# Altium PCB 示波器pcb.PcbDoc
Units mil, origin at the board's own origin, x right, y up, seen from the top; angles counter-clockwise.
Board outline 6795 x 3885 mil, 2 copper layers (Top Layer, Bottom Layer); 127 components, 203 nets, 627 pads, 78 vias.
Unrouted connection lines stored in the file: 167.
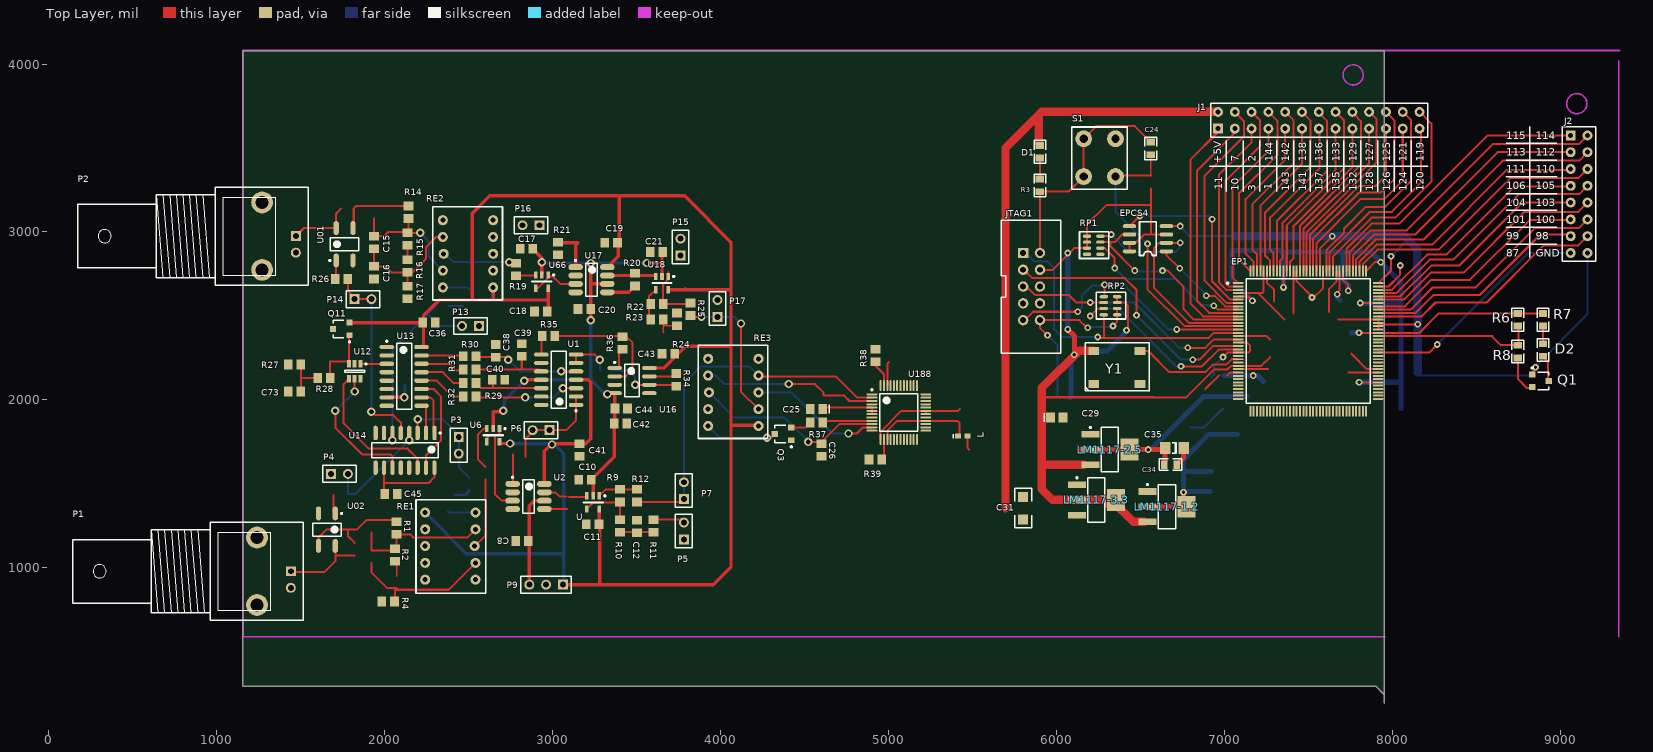
[diagram p0: Top Layer view]
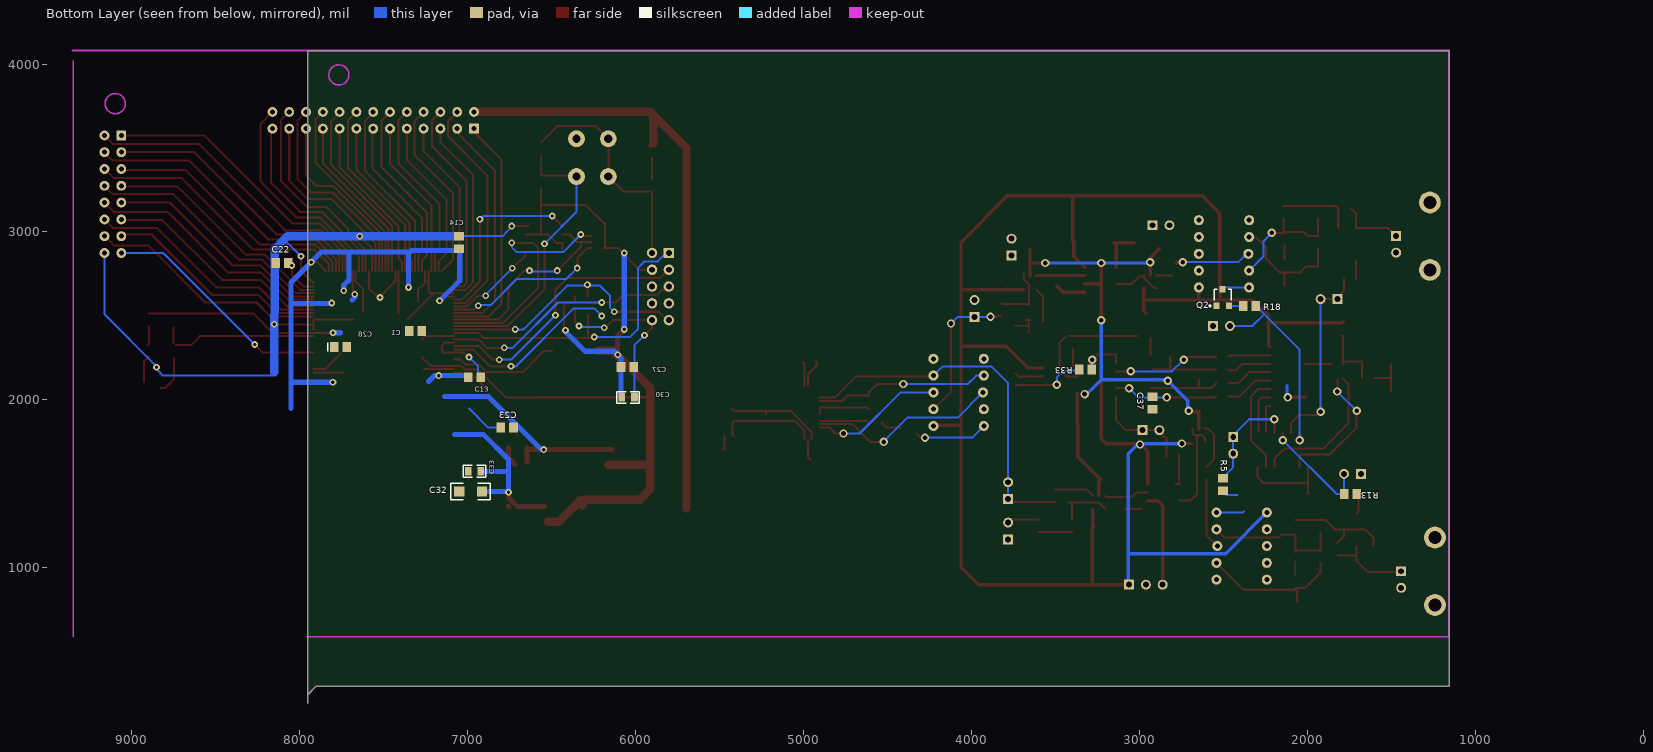
[diagram p1: Bottom Layer view, seen from below]

## Layer stack, top to bottom
Top Layer: signal copper 1.4
Dielectric: dielectric 12.6, FR-4, Dk 4.8
Bottom Layer: signal copper 1.4

## Board outline
1155,4080 7950,4080 7950,195 7950,245 7900,295 2380,295 1155,295 1155,4080

## Design rules (kind name [scope] priority, off if disabled: settings)
Clearance [All] p1: gap=1
HoleToHoleClearance [All] p1: gap=1 allowstackedmicrovias=TRUE
MinimumSolderMaskSliver [All] p1: minsoldermaskwidth=1
PolygonConnect [All] p1: connectstyle=Relief reliefconductorwidth=10 reliefentries=4 polygonreliefangle="90 Angle"
RoutingVias [All] p1: holewidth=28 width=50 viastyle="Through Hole" minholewidth=28 minwidth=50 maxholewidth=28 maxwidth=50
SilkToSilkClearance [All] p1: silktosilkclearance=1
SilkscreenOverComponentPads [All] p1: minsilkscreentomaskgap=1
SolderMaskExpansion [All] p1: expansion=4
TestPointUsage [All] p1: valid=0 allowmultiple=FALSE
Testpoint [All] p1: side=15 testpointundercomponent=TRUE minsize=40 maxsize=100 preferedsize=60 minholesize=0 maxholesize=40 preferedholesize=32 testpointgrid=1 style=1021 order=0-112345678
Width [All] p1: maxlimit=100 minlimit=10 preferedwidth=10
20 further rules are at their usual default settings.

## Classes and differential pairs
component class part_2: J1 J2
component class NEW_FPGA: D1 D2 EP1 EPCS4 JTAG1 LM1117-1.2 LM1117-2.5 LM1117-3.3 RP1 RP2 S1 Y1
component class 示波器原理图5: C25 C26 C27 C28 C29 C30 C31 L Q3 R37 R38 R39 RE3 u1 U188
component class 示波器原理图3: C32 C33 C34 C35 C36 C37 C38 C39 C40 C41 C42 C43 C44 C45 C73 Q11 R27 R28 R29 R30 R31 R32 R33 R34 R35 R36 U1 U12 U13 U14 U16 U?
component class 示波器原理图: C1 C2 C3 C4 C5 C6 C7 C8 C9 C10 C11 C12 P1 P3 P4 P5 P6 P7 P9 Q1 R1 R2 R3 R4 R5 R6 R7 R8 R9 R10 R11 R12 R13 RE1 RE4 U U02 U2 U6 U9 U20 U21
component class 示波器原理图2: C13 C14 C15 C16 C17 C18 C19 C20 C21 C22 C23 C24 P2 P13 P14 P15 P16 P17 Q2 R14 R15 R16 R17 R18 R19 R20 R21 R22 R23 R24 R25 R26 RE2 U01 U17 U18 U66

## Components (designator, comment, footprint, x,y, rotation, side; value= is the part's Value field where it differs from the comment)
C1 "" PCBComponent_1#1 7345,2410 r180 bottom
C8 "" PCBComponent_1#1 2780,1160 r0 top
C10 "" PCBComponent_1#1 3155,1525 r0 top
C11 "" PCBComponent_1#1 3200,1260 r0 top
C12 "" PCBComponent_1#1 3500,1210 r90 top
C13 "" PCBComponent_1#1 6920,2135 r0 bottom
C14 "" PCBComponent_1#1 7050,2975 r270 bottom
C15 "" PCBComponent_1#1 1935,2900 r90 top
C16 "" PCBComponent_1#1 1935,2720 r90 top
C17 "104" PCBComponent_1#1 2880,2900 r180 top
C18 "" PCBComponent_1#1 2965.88,2525.88 r180 top
C19 "" PCBComponent_1#1 3310,2935.74 r0 top
C20 "" PCBComponent_1#1 3150,2540.74 r0 top
C21 "" PCBComponent_1#1 3580,2880 r0 top
C22 "" PCBComponent_1#1 8140,2815 r180 bottom
C23 "" PCBComponent_1#1 6800,1835 r180 bottom
C24 "" 0805 6560,3535 r270 top
C25 "" C0805 4570,1945 r180 top
C26 "" PCBComponent_1#1 4600,1740 r270 top
C27 "" PCBComponent_1#1 6085,2195 r180 bottom
C28 "" C0805 7755,2315 r180 bottom
C29 "" C0805 6000,1895 r0 top
C30 "" 0805 6080,2015 r180 bottom
C31 "" C1206#1 5800,1355 r90 top
C32 "" C1206#1 6980,1455 r0 bottom
C33 "" 0805 6920,1575 r0 bottom
C34 "" 0805 6640,1615 r0 top
C35 "" C1206#2 6700,1715 r180 top
C36 "" PCBComponent_1#1 2300,2460 r180 top
C37 "" PCBComponent_1#1 2920,2020 r270 bottom
C38 "" PCBComponent_1#1 2660,2255 r90 top
C39 "" PCBComponent_1#1 2815,2260 r90 top
C40 "" PCBComponent_1#1 2640,2120 r0 top
C41 "" PCBComponent_1#1 3160,1740 r270 top
C42 "" PCBComponent_1#1 3440,1860 r180 top
C43 "" PCBComponent_1#1 3725,2275 r180 top
C44 "" PCBComponent_1#1 3370,1950 r0 top
C45 "" PCBComponent_1#1 2000,1440 r0 top
C73 "" PCBComponent_1#1 1425,2050 r0 top
D1 "LED0" 0805 5900,3515 r270 top
D2 "LED0" 0805 8895,2335 r270 top
EP1 "" PCBComponent_1#2 7080,2695 r0 top locked
EPCS4 "" PCBComponent_1#3 6540,2895 r180 top
J1 "" HDR2X13_CEN 6960,3615 r0 top locked
J2 "" HDR2X8_CEN 9060,3575 r270 top locked
JTAG1 "Header 5X2" IDC10 5800,2875 r270 top
L "" L0603 5440,1785 r0 top
LM1117-1.2 "" PCBComponent_1#4 6540,1455 r0 top
LM1117-2.5 "" PCBComponent_1#4 6200,1795 r0 top
LM1117-3.3 "" PCBComponent_1#4 6120,1495 r0 top
P1 "BNC" "BNC_RA CON" 1440,980 r0 top
P2 "BNC" "BNC_RA CON" 1470,2975 r0 top
P3 "Header 2" HDR1X2 2440,1780 r270 top
P4 "Header 2" HDR1X2 1680,1560 r0 top
P5 "Header 2" HDR1X2 3780,1170 r90 top
P6 "Header 2" HDR1X2 2980,1820 r180 top
P7 "Header 2" HDR1X2 3780,1410 r90 top
P9 "Header 3" HDR1X3 3060,900 r180 top
P13 "Header 2" HDR1X2 2560,2440 r180 top
P14 "Header 2" HDR1X2 1820,2600 r0 top
P15 "Header 2" HDR1X2 3760,2860 r90 top
P16 "Header 2" HDR1X2 2920,3040 r180 top
P17 "Header 2" HDR1X2 3980,2495 r90 top
Q1 "8050" PCBComponent_1#5 8830.71,2150.71 r270 top
Q2 "8050" PCBComponent_1#5 2540,2560 r180 bottom
Q3 "80501" PCBComponent_1#5 4420,1760 r90 top
Q11 "80501" PCBComponent_1#5 1790,2385 r90 top
R1 "" PCBComponent_1#1 2070,1200 r90 top
R2 "" PCBComponent_1#1 2060,1040 r90 top
R3 "" 0805 5900,3315 r270 top
R4 "" 2012[0805] 2020,800 r0 top
R5 "" PCBComponent_1#1 2500,1460 r90 bottom
R6 "" 0805 8745,2515 r270 top
R7 "" 0805 8895,2515 r270 top
R8 "" 0805 8745,2325 r270 top
R9 "" 2012[0805] 3400,1430 r270 top
R10 "" 2012[0805] 3400,1250 r90 top
R11 "" 2012[0805] 3600,1250 r270 top
R12 "" 2012[0805] 3500,1430 r90 top
R13 "" PCBComponent_1#1 1780,1440 r180 bottom
R14 "" PCBComponent_1#1 2140,3080 r90 top
R15 "" PCBComponent_1#1 2135,2920 r90 top
R16 "" PCBComponent_1#1 2135,2760 r90 top
R17 "" 2012[0805] 2135,2640 r90 top
R18 "" PCBComponent_1#1 2380,2560 r180 bottom
R19 "" PCBComponent_1#1 2780,2740 r90 top
R20 "" 2012[0805] 3490,2715.74 r270 top
R21 "" 2012[0805] 3030,2900.74 r90 top
R22 "" 2012[0805] 3620,2570 r180 top
R23 "" 2012[0805] 3620,2480 r180 top
R24 "" 2012[0805] 3740,2480 r270 top
R25 "" 2012[0805] 3820,2540 r90 top
R26 "" PCBComponent_1#1 1780,2720 r180 top
R27 "" PCBComponent_1#1 1499.8,2210 r180 top
R28 "" PCBComponent_1#1 1600,2130 r0 top
R29 "51" 2012[0805] 2505,2020 r0 top
R30 "51" 2012[0805] 2505,2260 r0 top
R31 "51" 2012[0805] 2505,2180 r0 top
R32 "51" 2012[0805] 2505,2100 r0 top
R33 "" 2012[0805] 3320,2180 r0 bottom
R34 "" 2012[0805] 3735,2120 r90 top
R35 "" 2012[0805] 2975,2380 r0 top
R36 "" 2012[0805] 3415,2340 r270 top
R37 "1K" 2012[0805] 4570,1865 r180 top
R38 "51" 2012[0805] 4920,2265 r90 top
R39 "51" 2012[0805] 4920,1645 r180 top
RE1 "TQ2-5V" PCBComponent_1#6 2240,1555 r270 top
RE2 "TQ2-5V" PCBComponent_1#6 2645,2445 r90 top
RE3 "" PCBComponent_1#6 4225,1620 r90 top
RP1 "Res Pack" PCBComponent_1#7 6180,2975 r0 top
RP2 "Res Pack" PCBComponent_1#7 6280,2615 r0 top
S1 "SW-SPST" SB-4 6160,3555 r270 top
U "AD8055ART" SOT95P245X110-5N 3240,1390 r270 top
U1 "TL074D" SOP127P600X175-14N 3035,2120 r180 top
U01 "" SOP254P610X218-4N 1860,3120 r90 top
U2 "AD603AR" SOIC127P600X175-8N 2855,1425 r0 top
U02 "" SOP254P610X218-4N 1555,1035 r270 top
U6 "AD8055ART3" SOT95P245X110-5N 2645,1790 r270 top
U12 "AD5320" SOT86P280X110-6N 1820,2170 r270 top
U13 "74HC4051" SOP127P600X175-16N 2115,2140 r0 top
U14 "SN74HC595D" SOP127P600X175-16N 2120,1700 r270 top
U16 "TL072D" SOP127P600X175-8N 3575,2040 r0 top
U17 "AD603AR" SOIC127P600X175-8N 3230,2715.74 r0 top
U18 "AD8055ART" SOT95P245X110-5N 3650,2695.74 r270 top
U66 "AD8055ART3" SOT95P245X110-5N 2935,2705 r270 top
U188 "" TSQFP50P900X900X160-48N 5060,1925 r0 top
Y1 "Active crystal" 5*7CRASTAL 6220,2095 r0 top

## Footprints (in the part's own frame and the unit in brackets; to place one, negate y for a bottom-side part, rotate by r counter-clockwise, add the part's x,y. Pads: shape width x height; smd on the part's side, far side on the other; paste and mask are expansions set on the pad)
5*7CRASTAL [mm]
  rect 1.6x1.2 smd: 1(0,0) 2(7,0) 3(7,5) 4(0,5)
  silkscreen extent -1.27,-1.04 8.38,6.22
0805 [mil]
  rect 40x50 smd: 1(0,0) 2(75,0)
  silkscreen extent -30,-35 105,35
2012[0805] [mm] "Chip Resistor; Body 2.0 x 1.3 mm (LxW typ)"
  rect 1.3x1.5 smd: 1(-0.95,0) 2(0.95,0)
"BNC_RA CON" [mm] "Connector; BNC Elbow"
  rect 1.5x1.5 hole 0.9: 1(0,0)
  round 3.3 hole 2: 2(-5.1,-5.1) 2(-5.1,5.1)
  round 1.5 hole 0.9: 2(0,-2.5)
  silkscreen extent -33,-7.4 1.9,7.4
C0805 [mm] "Chip Capacitor; Body 2.0 x 1.2 mm (LxW typ)"
  rect 1.3x1.5 smd: 1(-0.95,0) 2(0.95,0)
  silkscreen extent -1.9,-0.65 -1.9,0.65
C1206#1 [mil]
  rect 60x60 smd: 1(-67,0) 2(68,0)
  silkscreen extent -117,-50 118,50
C1206#2 [mil] "Chip Capacitor; Body 3.2 x 1.6 mm (LxW typ)"
  rect 62.99x70.87 smd: 1(-55.12,0) 2(55.12,0)
  silkscreen extent -12,-31 12,31
HDR1X2 [mm] "Connector; Header; 2 Position"
  rect 1.5x1.5 hole 0.9: 1(0,0)
  round 1.5 hole 0.9: 2(2.54,0)
  silkscreen extent -1.27,-1.27 3.81,1.27
HDR1X3 [mm] "Connector; Header; 3 Position"
  rect 1.5x1.5 hole 0.9: 1(0,0)
  round 1.5 hole 0.9: 2(2.54,0) 3(5.08,0)
  silkscreen extent -1.27,-1.27 6.35,1.27
HDR2X8_CEN [mm] "Connector; Header; 8x2 Position"
  rect 1.5x1.5 hole 0.762: 1(0,0)
  round 1.5 hole 0.762: 2(2.54,0) 3(5.08,0) 4(7.62,0) 5(10.16,0) 6(12.7,0) 7(15.24,0) 8(17.78,0) 9(0,2.54) 10(2.54,2.54) 11(5.08,2.54) 12(7.62,2.54) 13(10.16,2.54) 14(12.7,2.54) 15(15.24,2.54) 16(17.78,2.54)
  silkscreen extent -1.27,-1.27 19.05,3.81
HDR2X13_CEN [mm] "Connector; Header; 13x2 Position"
  rect 1.5x1.5 hole 0.762: 1(0,0)
  round 1.5 hole 0.762: 2(2.54,0) 3(5.08,0) 4(7.62,0) 5(10.16,0) 6(12.7,0) 7(15.24,0) 8(17.78,0) 9(20.32,0) 10(22.86,0) 11(25.4,0) 12(27.94,0) 13(30.48,0) 14(0,2.54) 15(2.54,2.54) 16(5.08,2.54) 17(7.62,2.54) 18(10.16,2.54) 19(12.7,2.54) 20(15.24,2.54) 21(17.78,2.54) 22(20.32,2.54) 23(22.86,2.54) 24(25.4,2.54) 25(27.94,2.54) 26(30.48,2.54)
  silkscreen extent -1.06,-1.27 31.75,3.81
IDC10 [mil]
  rect 62x62 hole 35: 1(0,0)
  round 62 hole 35: 2(0,100) 3(100,0) 4(100,100) 5(200,0) 6(200,100) 7(300,0) 8(300,100) 9(400,0) 10(400,100)
  silkscreen extent -195,-129 597,225
L0603 [mm] "Chip Inductor; Body 1.6 x 0.8 mm (LxW typ)"
  rect 0.9x0.8 smd: 1(-0.7,0) 2(0.7,0)
  silkscreen extent -1.45,-0.3 -1.45,0.3
PCBComponent_1#1 [mm]
  rect 1.3x1.5 smd: 1(0,0) 2(1.9,0)
PCBComponent_1#2 [mm]
  rect 1.6x0.3 smd: 1(0,0) 2(0,-0.5) 3(0,-1) 4(0,-1.5) 5(0,-2) 6(0,-2.5) 7(0,-3) 8(0,-3.5) 9(0,-4) 10(0,-4.5) 11(0,-5) 12(0,-5.5) 13(0,-6) 14(0,-6.5) 15(0,-7) 16(0,-7.5) 17(0,-8) 18(0,-8.5) 19(0,-9) 20(0,-9.5) 21(0,-10) 22(0,-10.5) 23(0,-11) 24(0,-11.5) 25(0,-12) 26(0,-12.5) 27(0,-13) 28(0,-13.5) 29(0,-14) 30(0,-14.5) 31(0,-15) 32(0,-15.5) 33(0,-16) 34(0,-16.5) 35(0,-17) 36(0,-17.5) 73(21.2,-17.5) 74(21.2,-17) 75(21.2,-16.5) 76(21.2,-16) 77(21.2,-15.5) 78(21.2,-15) 79(21.2,-14.5) 80(21.2,-14) 81(21.2,-13.5) 82(21.2,-13) 83(21.2,-12.5) 84(21.2,-12) 85(21.2,-11.5) 86(21.2,-11) 87(21.2,-10.5) 88(21.2,-10) 89(21.2,-9.5) 90(21.2,-9) 91(21.2,-8.5) 92(21.2,-8) 93(21.2,-7.5) 94(21.2,-7) 95(21.2,-6.5) 96(21.2,-6) 97(21.2,-5.5) 98(21.2,-5) 99(21.2,-4.5) 100(21.2,-4) 101(21.2,-3.5) 102(21.2,-3) 103(21.2,-2.5) 104(21.2,-2) 105(21.2,-1.5) 106(21.2,-1) 107(21.2,-0.5) 108(21.2,0)
  rect 0.3x1.6 smd: 37(1.85,-19.35) 38(2.35,-19.35) 39(2.85,-19.35) 40(3.35,-19.35) 41(3.85,-19.35) 42(4.35,-19.35) 43(4.85,-19.35) 44(5.35,-19.35) 45(5.85,-19.35) 46(6.35,-19.35) 47(6.85,-19.35) 48(7.35,-19.35) 49(7.85,-19.35) 50(8.35,-19.35) 51(8.85,-19.35) 52(9.35,-19.35) 53(9.85,-19.35) 54(10.35,-19.35) 55(10.85,-19.35) 56(11.35,-19.35) 57(11.85,-19.35) 58(12.35,-19.35) 59(12.85,-19.35) 60(13.35,-19.35) 61(13.85,-19.35) 62(14.35,-19.35) 63(14.85,-19.35) 64(15.35,-19.35) 65(15.85,-19.35) 66(16.35,-19.35) 67(16.85,-19.35) 68(17.35,-19.35) 69(17.85,-19.35) 70(18.35,-19.35) 71(18.85,-19.35) 72(19.35,-19.35) 109(19.35,1.85) 110(18.85,1.85) 111(18.35,1.85) 112(17.85,1.85) 113(17.35,1.85) 114(16.85,1.85) 115(16.35,1.85) 116(15.85,1.85) 117(15.35,1.85) 118(14.85,1.85) 119(14.35,1.85) 120(13.85,1.85) 121(13.35,1.85) 122(12.85,1.85) 123(12.35,1.85) 124(11.85,1.85) 125(11.35,1.85) 126(10.85,1.85) 127(10.35,1.85) 128(9.85,1.85) 129(9.35,1.85) 130(8.85,1.85) 131(8.35,1.85) 132(7.85,1.85) 133(7.35,1.85) 134(6.85,1.85) 135(6.35,1.85) 136(5.85,1.85) 137(5.35,1.85) 138(4.85,1.85) 139(4.35,1.85) 140(3.85,1.85) 141(3.35,1.85) 142(2.85,1.85) 143(2.35,1.85) 144(1.85,1.85)
  silkscreen extent -1.75,-18.15 20,0.65
PCBComponent_1#3 [mm]
  oval 2.032x0.61 smd: 1(-2.87,0.254) 2(-2.87,-1.016) 3(-2.87,-2.286) 4(-2.87,-3.556) 5(2.718,-3.556) 6(2.718,-2.286) 7(2.718,-1.016) 8(2.718,0.254)
  silkscreen extent -1.35,-4.19 1.19,0.89
PCBComponent_1#4 [mm]
  rect 2.7x1 smd: 1(0,0) 2(0,-2.3) 3(0,-4.6)
  rect 2.7x3.3 smd: 4(5.9,-2.3)
  silkscreen extent -0.12,-5.65 4.25,1.17, body extent 1.1,-5.65 4.8,1.05, height 1.7
PCBComponent_1#5 [mm]
  rect 0.9x0.95 smd: 1(0,0) 2(1.9,0) 3(0.95,2.5)
  silkscreen extent -1.12,-0.12 2.25,2.5
PCBComponent_1#6 [mm]
  round 1.524 hole 0.762: 1(5.715,0) 2(8.255,0) 3(10.795,0) 4(13.335,0) 5(15.875,0) 6(15.875,7.62) 7(13.335,7.62) 8(10.795,7.493) 9(8.255,7.62) 10(5.715,7.62)
  silkscreen extent 3.81,-1.4 17.91,9.14
PCBComponent_1#7 [mm]
  oval 1.27x0.508 smd: 1(0,0) 2(0,-0.889) 3(0,-1.803) 4(0,-2.743) 5(2.032,-2.743) 6(2.032,-1.803) 7(2.032,-0.889) 8(2.032,0)
  silkscreen extent -1.14,-3.38 3.3,0.69
SB-4 [mil]
  round 100 hole 50: 1(0,0) 1(225,0) 2(0,190) 2(225,190)
  silkscreen extent -70,-70 300,260
SOIC127P600X175-8N [mm] "SOIC, 8-Leads, Body 5.0x4.0mm (max), Pitch 1.27mm, IPC Medium Density"
  oval 2.2x0.9 smd: 1(-2.4,1.905) 2(-2.4,0.635) 3(-2.4,-0.635) 4(-2.4,-1.905) 5(2.4,-1.905) 6(2.4,-0.635) 7(2.4,0.635) 8(2.4,1.905)
  silkscreen extent -2.52,-2.5 0.9,3.03, body extent -2,-2.5 2,2.5, height 1.75
SOP127P600X175-8N [mm] "SOP, 8-Leads, Body 4.9x3.9mm (max), Pitch 1.27mm, IPC Medium Density"
  oval 2.2x0.6 smd: 1(-5.25,3.81) 2(-5.25,2.54) 3(-5.25,1.27) 4(-5.25,0) 5(0,0) 6(0,1.27) 7(0,2.54) 8(0,3.81)
  silkscreen extent -5.37,-0.55 -1.5,4.78, body extent -4.58,-0.55 -0.68,4.36, height 1.75
SOP127P600X175-14N [mm] "SOP, 14-Leads, Body 8.6x7.1mm (max), Pitch 1.27mm, IPC Medium Density"
  oval 2.2x0.65 smd: 1(-2.625,3.81) 2(-2.625,2.54) 3(-2.625,1.27) 4(-2.625,0) 5(-2.625,-1.27) 6(-2.625,-2.54) 7(-2.625,-3.81) 8(2.625,-3.81) 9(2.625,-2.54) 10(2.625,-1.27) 11(2.625,0) 12(2.625,1.27) 13(2.625,2.54) 14(2.625,3.81)
  silkscreen extent -2.75,-4.3 1.12,4.81, body extent -3.55,-4.33 3.55,4.33, height 1.75
SOP127P600X175-16N [mm] "SOP, 16-Leads, Body 10.0x8.9mm (max), Pitch 1.27mm, IPC Medium Density"
  oval 2.2x0.65 smd: 1(-2.625,4.445) 2(-2.625,3.175) 3(-2.625,1.905) 4(-2.625,0.635) 5(-2.625,-0.635) 6(-2.625,-1.905) 7(-2.625,-3.175) 8(-2.625,-4.445) 9(2.625,-4.445) 10(2.625,-3.175) 11(2.625,-1.905) 12(2.625,-0.635) 13(2.625,0.635) 14(2.625,1.905) 15(2.625,3.175) 16(2.625,4.445)
  silkscreen extent -2.75,-5 1.12,5.44, body extent -4.44,-5 4.44,5, height 1.75
SOP254P610X218-4N [mm] "SOP, 4-Leads, Body 4.3x3.9mm (max), Pitch 2.54mm, IPC Medium Density"
  oval 2.1x0.8 smd: 1(-7.35,3.81) 2(-7.35,1.27) 3(-2.45,1.27) 4(-2.45,3.81)
  silkscreen extent -7.47,0.39 -3.9,4.88, body extent -6.85,0.4 -2.96,4.68, height 2.18
SOT86P280X110-6N [mm] "SOT23, 6-Leads, Body 3.0x2.8mm (max), Pitch 0.86mm, IPC Medium Density"
  rect 1.15x0.6 smd: 1(-1.125,0.86) 2(-1.125,0) 3(-1.125,-0.86) 4(1.125,-0.86) 5(1.125,0) 6(1.125,0.86)
  silkscreen extent -1.25,-1.5 0.15,1.84, body extent -0.9,-1.5 0.9,1.5, height 1.1
SOT95P245X110-5N [mm] "SOT23, 5-Leads, Body 3.0x2.6mm (max), Pitch 0.95mm, IPC Medium Density"
  rect 1.1x0.55 smd: 1(-1,0.95) 2(-1,0) 3(-1,-0.95) 4(1,-0.95) 5(1,0.95)
  silkscreen extent -1.12,-1.5 0.05,1.9, body extent -0.7,-1.5 0.7,1.5, height 1.1
TSQFP50P900X900X160-48N [mm] "TSQFP, 48-Leads, Body 9.0x9.0mm (max), Pitch 0.50mm, IPC Medium Density"
  oval 1.65x0.3 smd: 1(-4.075,2.75) 2(-4.075,2.25) 3(-4.075,1.75) 4(-4.075,1.25) 5(-4.075,0.75) 6(-4.075,0.25) 7(-4.075,-0.25) 8(-4.075,-0.75) 9(-4.075,-1.25) 10(-4.075,-1.75) 11(-4.075,-2.25) 12(-4.075,-2.75) 25(4.075,-2.75) 26(4.075,-2.25) 27(4.075,-1.75) 28(4.075,-1.25) 29(4.075,-0.75) 30(4.075,-0.25) 31(4.075,0.25) 32(4.075,0.75) 33(4.075,1.25) 34(4.075,1.75) 35(4.075,2.25) 36(4.075,2.75)
  oval 0.3x1.65 smd: 13(-2.75,-4.075) 14(-2.25,-4.075) 15(-1.75,-4.075) 16(-1.25,-4.075) 17(-0.75,-4.075) 18(-0.25,-4.075) 19(0.25,-4.075) 20(0.75,-4.075) 21(1.25,-4.075) 22(1.75,-4.075) 23(2.25,-4.075) 24(2.75,-4.075) 37(2.75,4.075) 38(2.25,4.075) 39(1.75,4.075) 40(1.25,4.075) 41(0.75,4.075) 42(0.25,4.075) 43(-0.25,4.075) 44(-0.75,4.075) 45(-1.25,4.075) 46(-1.75,4.075) 47(-2.25,4.075) 48(-2.75,4.075)
  silkscreen extent -4.2,-2.85 2.85,3.57, body extent -3.5,-3.5 3.5,3.5, height 1.6

## Part data
C1 C13 C14 C22 C23 C24 C27 C35: library part "Cap Semi", "Capacitor (Semiconductor SIM Model)"
C8 C10 C11 C12 C15 C16 C17 C18 C19 C20 C21 C26 C36 C37 C38 C39 C40 C41 C42 C43 C44 C45 C73: library part Cap, "Capacitor"
C25 C28 C29: library part "Cap Pol3", "Polarized Capacitor (Surface Mount)"
C30 C33 C34: library part CAP, "Capacitor"
C31 C32: library part "Cap Pol2", "Polarized Capacitor (Axial)"
D1 D2: "Typical INFRARED GaAs LED"
EP1 EPCS4 LM1117-1.2 LM1117-2.5 LM1117-3.3 RE1 RE2 RE3 U01 U02 U12 U13 U188: library part Component_1
J1: library part "Header 13X2A", "Header, 13-Pin, Dual row"
J2: library part "Header 8X2A", "Header, 8-Pin, Dual row"
JTAG1: "Header, 5-Pin, Dual row"
L: library part Inductor, "Inductor"
P1 P2: "BNC Elbow Connector"
P3 P4 P5 P6 P7 P13 P14 P15 P16 P17: "Header, 2-Pin"
P9: "Header, 3-Pin"
Q1: library part 2N3904, "NPN General Purpose Amplifier"
Q2 Q3 Q11: library part 2N3906, "PNP General Purpose Amplifier"
R1 R2 R5 R13 R14 R15 R16 R18 R19 R26 R27 R28: library part Res1, "Resistor"
R3 R6 R7 R8: library part Res2, "Resistor"
R4 R9 R10 R11 R12 R17 R20 R21 R22 R23 R24 R25 R29 R30 R31 R32 R33 R34 R35 R36 R37 R38 R39: library part "Res Semi", "Semiconductor Resistor"
RP1 RP2: library part "Res Pack3", "Isolated Resistor Network"
S1: library part SW-SPST_1, "Single-Pole, Single-Throw Switch"
U U18: "Low Cost, 300MHz Voltage Feedback Amplifier"
U1 U16: "Low-Noise JFET-Input Operational Amplifier"
U2 U17: "Low-Noise, 90MHz Variable Gain Amplifier"
U6 U66: library part AD8055ART, "Low Cost, 300MHz Voltage Feedback Amplifier"
U14: "8-Bit Shift Register with 3-State Output Registers"

## Via types
v1: diameter 40, hole 20, Top Layer to Bottom Layer, 48 vias
v2: diameter 50, hole 28, Top Layer to Bottom Layer, 30 vias

## Nets (pads, with @x,y where several pads share a name; then routed paths per layer and width w, separated by ;. In a path a pad name is that pad's centre, name@x,y a point inside that pad or via, vN(x,y) a via of type N, cw(c..) or ccw(c..) an arc to the next point about the centre after c; other vN are vias at no path point)
1: EP1.1 J1.4 | length 1023.6
  Top Layer w12: EP1.1 7045,2730 7045,3265 7260,3480 J1.4
2: EP1.2 J1.16 | length 1208.8
  Top Layer w12: EP1.2 7024.69,2675.32 7005,2695 7005,3305 7210,3510 7210,3665 J1.16
3: EP1.3 J1.3 | length 1129.2
  Top Layer w12: EP1.3 7009.37,2655.63 6965,2700 6965,3340 7160,3535 J1.3
3.3V: C45.1 U14.10 U14.16 | length 538.4
  Top Layer w12: 1995,1505 2260,1505 2295,1540 U14.16 ; U14.10@1995,1588.15 U14.10 1995,1445 C45.1
5V: D1.1 J1.14 LM1117-3.3.3 | length 3679.8
  Top Layer w12: 5910,3715 5920,3705
  Top Layer w30: D1.1@5892.3,3527.7 D1.1@5905,3515
  Top Layer w50: 5695,1355 5695,3500 5877.5,3682.5 ; D1.1@5892.3,3527.7 5892.3,3697.3 5910,3715 J1.14
7: EP1.7 J1.15 | length 1366.1
  Top Layer w12: J1.15@7070,3705 7115,3660 7115,3570 6880,3335 6880,2710 7013.11,2576.89 EP1.7
10: EP1.10 J1.2 | length 1393.1
  Top Layer w12: J1.2 7060,3590 6835,3365 6835,2590 6907.17,2517.83 EP1.10
11: EP1.11 J1.1 | length 1425.2
  Top Layer w12: J1.1 6960,3595 6795,3430 6795,2575 6871.85,2498.15 EP1.11
28: EP1.28 | length 185.8
  Top Layer w12: 6885,2065 6965,2145 ; 7015,2145 7033.5,2163.5 EP1.28
30: EP1.30
31: EP1.31
32: EP1.32
33: EP1.33
34: EP1.34
38: EP1.38
39: EP1.39
42: EP1.42
43: EP1.43
44: EP1.44
46: EP1.46
49: EP1.49
50: EP1.50
51: EP1.51
52: EP1.52
53: EP1.53
54: EP1.54
55: EP1.55
58: EP1.58
59: EP1.59
60: EP1.60
64: EP1.64
65: EP1.65
66: EP1.66
67: EP1.67
68: EP1.68
69: EP1.69
70: EP1.70
71: EP1.71
72: EP1.72
73: EP1.73
74: EP1.74
75: EP1.75
76: EP1.76
77: EP1.77
80: EP1.80
83: EP1.83
84: EP1.84
85: EP1.85
86: EP1.86
87: EP1.87 | length 1391.1
  Top Layer w12: EP1.87 8216.61,2281.61 v1(8265,2330)
  Bottom Layer w12: v1(8265,2330) 8810,2875 9060,2875
98: EP1.98 | length 1442.9
  Top Layer w12: EP1.98 8173.15,2498.15 8255,2580 8560,2580 8900,2920 9105,2920 9160,2975
99: EP1.99 | length 1309.9
  Top Layer w12: EP1.99 8137.83,2517.83 8245,2625 8520,2625 8880,2985 9031.06,2985
100: EP1.100 | length 1468
  Top Layer w12: EP1.100 8107.52,2537.52 8240,2670 8495,2670 8850,3025 9110,3025 9160,3075
101: EP1.101 | length 1355.8
  Top Layer w12: EP1.101 8072.2,2557.2 8230,2715 8460,2715 8815,3070 9058,3070
103: EP1.103 | length 1484.9
  Top Layer w12: EP1.103 8066.57,2596.57 8230,2760 8425,2760 8785,3120 9105,3120 9160,3175
104: EP1.104 | length 1369.8
  Top Layer w12: EP1.104 8046.26,2616.26 8230,2800 8395,2800 8770,3175 9053,3175
105: EP1.105 | length 1510.1
  Top Layer w12: EP1.105 8020.94,2635.94 8220,2835 8360,2835 8750,3225 9110,3225 9160,3275
106: EP1.106 | length 1399
  Top Layer w12: EP1.106 7995.63,2655.63 8205,2865 8320,2865 8725,3270 9045,3270 9055,3280
110: EP1.110 | length 1612.4
  Top Layer w12: EP1.110 7822.13,2807.13 7910,2895 8275,2895 8700,3320 9105,3320 9160,3375
111: EP1.111 | length 1549
  Top Layer w12: EP1.111 7802.44,2822.44 7905,2925 8235,2925 8680,3370 9070,3370
112: EP1.112 | length 1728.2
  Top Layer w12: EP1.112 7782.76,2837.76 7900,2955 8185,2955 8655,3425 8890,3425 ; 8880,3425 9110,3425 9165,3480
113: EP1.113 | length 1646.8
  Top Layer w12: EP1.113 7763.07,2858.07 7890,2985 8135,2985 8625,3475 9050,3475 9060,3485
114: EP1.114 J2.9 | length 1818.6
  Top Layer w12: EP1.114 7743.39,2883.39 7870,3010 8085,3010 8600,3525 9110,3525 J2.9
115: EP1.115 J2.1 | length 1747.3
  Top Layer w12: EP1.115 7723.7,2898.7 7875,3050 8040,3050 8565,3575 J2.1
119: EP1.119 J1.26 | length 1300.5
  Top Layer w12: EP1.119 7644.96,2854.96 7875,3085 8015,3085 8230,3300 8230,3645 J1.26
120: EP1.120 J1.13 | length 1153.1
  Top Layer w12: EP1.120 7625.28,2880.28 7865,3120 7995,3120 8170,3295 8170,3605 J1.13
121: EP1.121 J1.25 | length 1244.2
  Top Layer w12: EP1.121 7605.59,2890.59 7710,2995 7710,3020 7840,3150 7955,3150 8110,3305 8110,3665 J1.25
124: EP1.124 J1.12 | length 1143
  Top Layer w12: EP1.124 7546.54,2933.46 7808.07,3195 7950,3195 8060,3305 J1.12
125: EP1.125 J1.24 | length 1244.2
  Top Layer w12: EP1.125 7526.85,2961.85 7800,3235 7930,3235 8010,3315 8010,3665 J1.24
126: EP1.126 J1.11 | length 1093.3
  Top Layer w12: EP1.126 7507.17,2982.17 7800,3275 7900,3275 7960,3335 J1.11
127: EP1.127 J1.23 | length 1138.7
  Top Layer w12: EP1.127 7487.48,2997.48 7905,3415 7905,3670 J1.23
128: EP1.128 J1.10 | length 1009.6
  Top Layer w12: EP1.128 7467.8,3017.8 7860,3410 J1.10
129: EP1.129 J1.22 | length 1098.6
  Top Layer w12: EP1.129 7448.11,3038.11 7810,3400 7810,3660 J1.22@7770,3700
132: EP1.132 J1.9 | length 1002.9
  Top Layer w12: EP1.132 7389.06,2824.06 7410,2845 7410,3029.98 7407.49,3032.49 7760,3385 J1.9
133: EP1.133 J1.21 | length 1109
  Top Layer w12: EP1.133 7369.37,3039.37 7710,3380 7710,3665 J1.21
135: EP1.135 J1.8 | length 983.9
  Top Layer w12: EP1.135 7330,2830 7345,2845 7345,3054.99 7660,3370 J1.8
136: EP1.136 J1.20 | length 1079.9
  Top Layer w12: EP1.136 7310.31,3065.31 7610,3365 7610,3660 J1.20@7565,3705
137: EP1.137 J1.7 | length 984.1
  Top Layer w12: EP1.137 7290.63,2874.37 7270,2895 7270,3085 7565,3380 7565,3600 J1.7@7550,3615
138: EP1.138 J1.19 | length 1092.5
  Top Layer w12: EP1.138 7270.94,2829.06 7240,2860 7240,3115 7510,3385 7510,3665 J1.19
141: EP1.141 J1.6 | length 949.9
  Top Layer w12: EP1.141 7211.89,3156.89 7460,3405 J1.6
142: EP1.142 J1.18 | length 1080.6
  Top Layer w12: EP1.142 7192.2,2867.8 7165,2895 7165,3165 7410,3410 7410,3665 J1.18
143: EP1.143 J1.5 | length 964.2
  Top Layer w12: EP1.143 7172.52,2822.48 7125,2870 7125,3195 7360,3430 J1.5
144: EP1.144 J1.17 | length 1079.2
  Top Layer w12: EP1.144 7085,2835.67 7085,3230 7315,3460 7315,3660 J1.17@7270,3705
+3.3: C31.1 L.1 U188.8 U188.15 U188.28 U188.33 U188.46 | length 736
  Top Layer w12: U188.15 4991.1,1816.1 5050.79,1875.79 U188.28 5409.21,1875.79 5420,1865 5420,1792.56 L.1 ; U188.46 4991.1,2216.1 5000,2225
+5: C11.2 C19.2 C36.2 C41.1 C43.1 P9.1 Q11.2 RE1.1 RE2.1 RE3.1 U1.4 U2.8 U6.5 U13.16 U16.8 U17.8 U18.5 U66.5 U.5 | length 11895.5
  Top Layer w20: Q11.2@1784.8,2465 Q11.2 C36.2@2229.8,2459.8 ; U13.16 2229.8,2326.46 C36.2@2229.8,2459.8 ; C36.2@2235,2460 2234.8,2459.8 C36.2@2229.8,2459.8 ; RE2.1 2645,2595 ; U6.5@2682.4,1740.63 v2(2745.63,1740.63) ; U2.8 2949.8,1500.31 2949.8,1694.8 2995,1740 3195,1740 3225,1770 3225,2105 3210,2120 U1.4 ; 2960,2520 2972.4,2532.4 2972.4,2595 ; 2972.4,2642.4 U66.5 2972.4,2595 ; P9.1 3265,900 3955.53,900 4060.53,1005 4060.53,1850 ; C11.2@3269.8,1245 3280,1234.8 3280,900 ; C11.2@3277.4,1245 U.5 ; U17.8 3390,2856.25 3390,2930.54 C19.2 3395,2945.93 3395,3215 ; U16.8 3660,2190 3790,2320 4060.53,2320 ; U18.5 3785.43,2656.37 3790,2660.93 ; 3790,2656.37 4055,2656.37 ; RE3.1 4220,1850 4060.53,1850 ; C36.2@2229.8,2459.8 2230,2460 2230,2500 2325,2595 2520,2595 ; 2520,2595 2645,2595 ; 2520,2595 2520,3110 2625,3215 3395,3215 ; 2645,2595 2972.4,2595 ; 3395,3215 3785,3215 4060.53,2939.47 4060.53,2320 ; 4060.53,1850 4060.53,2320
  Bottom Layer w20: RE1.1 2485,1085 3065,1085 ; v2@2745.63,1739.37 3005.63,1739.37 3065,1680 P9.1@3065,900
  other v2: 2995,1735
-5: C8.2 C10.2 C20.2 C21.2 C42.2 C44.1 P9.3 U1.11 U2.6 U6.2 U13.7 U16.4 U17.6 U18.2 U66.2 U.2 | length 4325.3
  Top Layer w20: U13.7 v2(2115,2015) ; U6.2 2645,1930 v2@2700,1930 ; v2@2835,2120 U1.11 ; 2860,1225 2860,1370 2890,1400 U2.6 ; P9.3@2860.2,890 2860.2,1230 ; 2880,2900 2935,2845 U66.2 ; 3224.8,2690.74 C20.2 3224.8,2475.2 v2(3225,2475) ; v2(3225,2815) 3225,2695 3229.26,2690.74 U17.6 ; U.2 3240,1514.8 C10.2 3365.2,1660.39 C42.2 3368.31,1863.11 3368.31,1950 U16.4 ; v2(3325,2035) U16.4@3330,2040 ; v2(3560,2815) 3645,2815 3650,2820 C21.2@3650,2900.93 ; U18.2 3650,2850
  Bottom Layer w20: v2(2115,2015) 2120,2020 2120,2085.2 ; v2@2710,1940 2710,1995 v2(2830,2115) ; v2@2835,2120 3225,2120 ; v2(2935,2820) 2940,2815 v2(3560,2815) ; v2(3225,2475) 3225,2120 ; v2@3325,2045 3300,2045 3225,2120
  other v2: 2705,1935
AD_CH1: P7.1 P7.2 R12.1 RE3.4 U188.2 | length 2218.3
  Top Layer w12: R12.1 3762.6,1392.6 P7.1 ; RE3.4@4220,2140 4685,2140 4811.42,2013.58 U188.2
  Bottom Layer w12: P7.1 P7.2 3780,2100 3880,2200 4170,2200 RE3.4
AD_CH2: P17.1 P17.2 R25.1 RE3.2 | length 888.2
  Top Layer w12: R25.1 3842.4,2502.6 3850,2495 v2(3885,2495) ; v2(4120,2455) 4120,2050 RE3.2
  Bottom Layer w12: v2(3885,2495) P17.1 P17.1@3985,2495 ; P17.1@4000,2495 P17.1@3985,2495 ; v2(4120,2455) 4080,2495 P17.1@3985,2495
AD_CLKA: R38.2
AD_CLKB: R39.2
AD_DA0: U188.37
AD_DA1: U188.38
AD_DA2: U188.39
AD_DA3: U188.40
AD_DA4: U188.41
AD_DA5: U188.42
AD_DA6: U188.43
AD_DA7: U188.44
AD_DB0: U188.24
AD_DB1: U188.23
AD_DB2: U188.22
AD_DB3: U188.21
AD_DB4: U188.20
AD_DB5: U188.19
AD_DB6: U188.18
AD_DB7: U188.17
AD_S: R37.1 U14.7 U188.9 | length 296.6
  Top Layer w12: R37.1 4618.19,1875.79 U188.9
ASDO: EP1.6 EPCS4.5 | length 1095
  Top Layer w12: EPCS4.5 6493,3095 v1(6495,3095) ; v1(6925,3075) 6925,2705 7033.43,2596.57 EP1.6
  Bottom Layer w12: v1(6495,3095) 6905,3095 v1(6925,3075)
"CH1 ACDC": P4.1 P4.2 R13.1 U14.4 | length 660.9
  Top Layer w12: v2(2145,1760) U14.4
  Bottom Layer w12: P4.2 R13.1 1825,1440 v2(2145,1760)
"CH1 ATT": P3.1 P3.2 R5.2 U14.3 | length 646.1
  Top Layer w12: U14.3 v2(2195,1885)
  Bottom Layer w12: v2(2195,1885) 2345,1885 2440,1790 P3.1 P3.2 2440,1600 2500,1540 R5.2
CH1_VAMP: P6.1 P6.2 U1.1 U1.2 | length 619.2
  Top Layer w12: 2837.4,1660 2837.4,1767.4 2880,1810 P6.2 ; P6.2@2862.6,1820 P6.2 ; U1.2 U1.1 3138.35,1878.35 3080,1820 P6.1 P6.2
CH1_VPOS: P5.1 P5.2 R11.1 R34.2 U16.7 | length 354.4
  Top Layer w12: U16.7 3717.6,2140 R34.2 ; R11.1 3762.6,1287.4 P5.2
"CH2 ACDC": P14.1 P14.2 R26.1 U14.5 | length 1174.3
  Top Layer w12: R26.1 1780,2650 P14.1@1830,2600 ; P14.1 P14.2 ; v2(1920,1930) 1940,1910 2050,1910 2095,1865 U14.5
  Bottom Layer w12: v2(1920,1930) P14.2
"CH2 ATT": P13.1 P13.2 R18.2 U14.6 | length 1184.6
  Top Layer w20: v2(2045,1760) U14.6
  Bottom Layer w12: v2(2045,1760) 2045,2299.8 2255.71,2510.51 ; R18.2 2255.71,2510.51 ; P13.2 2326.21,2440 2255.71,2510.51
CH2_VAMP: P16.1 P16.2 R21.1
CH2_VPOS: P15.1 P15.2 R24.1
CLK: EP1.24 Y1.3 | length 668.9
  Top Layer w12: Y1.3 6543.15,2291.85 6670,2165 6885,2165 6930,2210 7010,2210 7042.24,2242.24 EP1.24
DATA0: EP1.13 EPCS4.2 RP1.8 | length 1552.9
  Top Layer w12: RP1.8 6315,2975 v1(6325,2985) ; v1(6735,2935) 6610,2935 6580,2905 6580,2665 6786.22,2458.78 EP1.13
  Bottom Layer w12: v1(6325,2985) 6430,2880 6705,2880 6735,2910 v1(6735,2935)
DCLK: EP1.12 EPCS4.6 RP1.7 | length 1221.5
  Top Layer w12: RP1.7 6345,2940 6390,2985 EPCS4.6 ; 6320,2935 6320,2915 v1(6465,2770) ; v1(6630,2770) 6660,2770 6755,2675 6755,2540 6816.54,2478.46 EP1.12
  Bottom Layer w12: v1@6470,2765 v1@6625,2765
GND: C1.1 C8.1 C10.1 C11.1 C12.2 C13.1 C14.1 C16.1 C17.1 C18.1 C19.1 C20.1 C21.1 C22.1 C23.1 C24.1 C25.2 C26.2 C27.2 C28.2 C29.2 C30.2 C31.2 C32.2 C33.2 C34.2 C35.1 C36.1 C37.2 C38.2 C39.2 C40.2 C41.2 C42.1 C43.2 C44.2 C45.2 C73.1 EP1.4 EP1.19 EP1.22 EP1.27 EP1.36 EP1.41 EP1.48 EP1.57 EP1.63 EP1.79 EP1.82 EP1.94 EP1.95 EP1.96 EP1.97 EP1.108 EP1.118 EP1.123 EP1.131 EP1.140 EPCS4.4 JTAG1.2 JTAG1.10 LM1117-1.2.1 LM1117-2.5.1 LM1117-3.3.1 P1.2 P2.2 P9.2 Q1.1 Q2.1 Q3.1 Q11.3 R3.2 R4.1 R17.1 R27.2 RP2.5 RP2.6 S1.1 U01.2 U02.2 U2.4 U12.2 U13.6 U13.8 U14.8 U14.13 U16.3 U16.5 U17.4 U188.1 U188.4 U188.12 U188.16 U188.27 U188.29 U188.32 U188.34 U188.45 Y1.2 | length 4618.4
  Top Layer w12: JTAG1.2 R3.2 6070,3240 6160,3330 6160,3555 6235,3630 6465,3630 C24.1 ; v1(5945,2385) 5900,2430 JTAG1.10 6135,2475 6180,2430 v1(6185,2430) ; v1(6335,2440) 6360,2465 RP2.5 RP2.6 ; v1(6990,2255) 7016.61,2281.61 EP1.22 7141.61,2281.61 7150,2290 7150,2300 7150,2325 7134.33,2340.67 EP1.19 ; EP1.27 7258.19,2183.19 ; EP1.4 7199.06,2635.94 ; EP1.140 7231.57,2643.46 7224.06,2635.94 7199.06,2635.94 ; 7355,2480 7199.06,2635.94 ; 7408.74,2513.74 EP1.131 ; 7620,2525 7620,2660 7664.65,2704.65 EP1.118 ; 7755,2275 7846.81,2183.19 EP1.82
  Top Layer w30: C34.2 6755.12,1655.12 C35.1
  Bottom Layer w12: v1(5945,2385) 6005,2325 C30.2 ; v1(6185,2430) 6190,2435 6330,2435 v1(6335,2440) ; C23.1@6795,1835 6875,1835 6990,1950 ; C13.1 6935,2150 6935,2200 v1(6990,2255)
NCE: EP1.21 RP2.3 | length 1181.7
  Top Layer w12: v1(6200,2500) 6244,2544 RP2.3 ; v1(6740,2200) 6865,2200 6966.3,2301.3 EP1.21
  Bottom Layer w12: v1(6200,2500) 6245,2545 6365,2545 6710,2200 v1(6740,2200)
NCSO: EP1.8 EPCS4.1 | length 566.9
  Top Layer w12: 6652.5,2872.5 6652.5,2862.5 v1(6731.77,2783.23) ; v1(6890,2620) 6940,2620 7002.8,2557.2 EP1.8
  Bottom Layer w12: v1(6731.77,2783.23) 6890,2625 v1(6890,2620)
NetC1_1: P1.1 U02.4 | length 514.8
  Top Layer w12: P1.1@1445,975 1640,975 1705,1040 U02.4 U02.4@1705,1110 ; 1705,1075 1820,1075
NetC1_2: U02.3 | length 653.7
  Top Layer w12: U02.3 1605,1180 1655,1230 1780,1230 ; 1820,1149.8 1780,1189.8 1780,1230 ; 2070,1284.8 1920,1284.8 1889.8,1284.8 1835,1230 1780,1230
NetC2_1: R2.2 RE1.9 | length 849.4
  Top Layer w12: 1920,1210 1920,1104.8 R2.2@2070,1104.8 ; R2.2@2070,1094.8 2070,1200 ; 2080,1200 2150,1200 2170,1180 2490,1180 RE1.9
NetC3_1: R4.2 RE1.7 | length 887.9
  Top Layer w12: 1920,1030 1920,975 2015,880 2060,880 ; R4.2 2060,802.6 2060,880 ; 2065,870 2380,870 RE1.7 ; 2085,865 2070,880 2060,880
NetC9_1: U2.1 | length 195.4
  Top Layer w12: 2762.6,1675 2762.6,1502.09 U2.1 U2.1@2780,1500
NetC12_1: C12.1 R10.1 R11.2 | length 200
  Top Layer w12: R10.1 R11.2
NetC13_1: P2.1 U01.4 | length 389
  Top Layer w12: P2.1 1518.54,3023.54 U01.4 1710,3110 1740,3140
NetC13_2: R14.2 U01.3 | length 490.2
  Top Layer w12: U01.3 1814.8,3028.35 1814.8,3140 1829.61,3154.8 1865,3154.8 ; 1854.61,3154.8 1865,3154.8 ; 1935,3154.8 R14.2 ; 1965,3154.8 1865,3154.8
NetC14_1: R14.1 R15.2 RE2.9 | length 767.7
  Top Layer w12: 1935,3080 1935,2974.8 1994.8,2974.8 2020,3000 2129.8,3000 R15.2 ; R14.1 2140,2999.8 R15.2 ; v2@2195,2990 v2@2190.2,2994.8 ; v2(2210.2,2994.8) v2@2190.2,2994.8 ; R15.2 v2@2190.2,2994.8
  Bottom Layer w12: v2(2210.2,2994.8) 2260,2945 2260,2855 RE2.9
NetC15_1: C15.1 R16.1 R17.2 RE2.7 | length 740.2
  Top Layer w12: C15.1 1935,2794.8 2005.2,2794.8 2040,2760 R16.1 ; R17.2 R16.1 ; RE2.7 2305,2970 2245,2910 2245,2840 2165,2760 R16.1
NetC23_1: R21.2 U17.1 | length 271
  Top Layer w20: R21.2@3030,2935.74 3150,2935.74 3135.51,2921.25 U17.1
NetC24_1: R23.1 R24.2 | length 190.5
  Top Layer w10: R23.1@3647.4,2475.74 R23.1@3657.4,2475.74 ; 3657.4,2442.6 R24.2 ; R23.1 R23.1@3657.4,2475.74 ; 3660,2400 3657.4,2402.6 R23.1@3657.4,2475.74 ; R23.1@3674.26,2475.74 R23.1@3657.4,2475.74
NetC25_1: C25.1 U188.5 U188.6 U188.7 | length 335.5
  Top Layer w12: C25.1 4616.93,1954.53 U188.5 U188.6 U188.7
NetC26_1: RE3.8 U188.10 | length 1148.6
  Top Layer w12: v2(4520,1750) 4600,1750 4706.1,1856.1 U188.10
  Bottom Layer w12: RE3.8@3930,2035 RE3.8 4080,1895 4380,1895 4520,1755 v2(4520,1750)
NetC27_1: RE3.7 U188.3 | length 1048.9
  Top Layer w12: v2(4405,2095) 4560,2095 4610,2045 4610,2025 4735,2025 4766.1,1993.9 U188.3
  Bottom Layer w12: RE3.7 3970,2145 4020,2095 v2(4405,2095)
NetC28_1: L.2 | length 84.1
  Top Layer w12: L.2 5467.56,1714.84 5477.4,1705
NetC29_1: U188.13 U188.30 U188.31 U188.48 | length 592.9
  Top Layer w12: U188.13 4951.73,1811.73 5074.84,1934.84 U188.31 ; U188.30 U188.31 ; 5422.6,1945 5412.44,1934.84 U188.31
NetC34_2: Q11.1 R28.2 U12.3 | length 390.2
  Top Layer w12: R28.2 1674.8,2230 1770.43,2230 U12.3 Q11.1@1786.14,2385 ; Q11.1 Q11.1@1791.14,2383.86
NetC37_1: C37.1 R29.2 U1.3 | length 620.8
  Top Layer w12: R29.2 2547.4,2015 2660,2015 v2(2835,2015) ; v2(3060,2070) U1.3
  Bottom Layer w12: v2(2835,2015) 3005,2015 v2(3060,2070)
NetC38_1: C38.1 R30.2 U1.5 | length 640.3
  Top Layer w12: R30.2@2542.4,2250 R30.2@2547.4,2255 ; R30.2 R30.2@2547.4,2255 ; v2(2735,2240) 2720,2255 C38.1 R30.2@2547.4,2255 ; v2(3050,2170) U1.5
  Bottom Layer w12: v2(2735,2240) 2805,2170 v2(3050,2170)
NetC39_1: C39.1 R31.2 U1.10 | length 490.9
  Top Layer w12: R31.2 2810,2180 ; C39.1 2815,2185 2810,2180 ; U1.10@2945,2165 2931.65,2165 2916.65,2180 2810,2180
NetC40_1: C40.1 R32.2 U1.12 | length 451.7
  Top Layer w12: R32.2 2572.4,2070 2635,2070 U1.12 ; 2645,2070 C40.1@2645,2120
NetD1_2: D1.2 R3.1 | length 125
  Top Layer w12: R3.1 D1.2
NetD2_1: D2.1 | length 119.1
  Top Layer w12: 8895,2440 D2.1 D2.1@8905,2325
NetD2_2: D2.2 | length 164.2
  Top Layer w12: D2.2 8923.43,2231.57 8923.43,2107.6
NetEP1_92: EP1.92 R8.1 | length 944
  Top Layer w12: EP1.92 8594.96,2380.04 8589.96,2380.04 8643.63,2326.37 R8.1@8736.37,2326.37 ; R8.1@8750,2340 8750,2430
NetQ1_2: Q1.2 R8.2 | length 227.7
  Top Layer w12: R8.2 8745,2125 8799.8,2070.2 Q1.2@8825,2070.2
NetQ1_3: Q1.3 RE1.10 | length 177.3
  Top Layer w12: RE1.10@2540,1310 RE1.10@2542.6,1312.6
  Bottom Layer w12: 2377.4,1336.57 2383.98,1330 2520,1330 RE1.10@2540,1310
NetQ2_2: Q2.2 R18.1 | length 85.2
  Bottom Layer w12: R18.1 Q2.2
NetQ2_3: Q2.3 RE2.10 | length 162.4
  Bottom Layer w12: RE2.10 2491.02,2670 Q2.3
NetQ3_2: Q3.2 R37.2 | length 125.1
  Top Layer w12: Q3.2 4502.4,1834.8 R37.2
NetQ3_3: Q3.3 RE3.10 | length 436.5
  Top Layer w12: v2(4275,1775) 4300,1775 4322.4,1797.4 Q3.3
  Bottom Layer w12: RE3.10 3995,1775 v2(4275,1775)
NetR2_1: R2.1 | length 90
  Top Layer w10: 2070,950 R2.1@2070,1040
NetR6_1: U6.3 | length 280.5
  Top Layer w12: 2600,1600 2555,1645 2555,1795 2589.37,1829.37 U6.3
NetR6_2: R6.2 RE1.8 | length 422.1
  Top Layer w12: RE1.8 2600,1195 2600,1525.2
NetR7_1: U2.7 U.3 | length 251.6
  Top Layer w12: U2.7 3015,1450 3040.63,1424.37 3080,1424.37 ; 3095,1422.4 3195.63,1422.4 U.3
NetR7_2: R7.2 U2.5 | length 95.5
  Top Layer w12: U2.5@2989.49,1350 3085,1350
NetR9_1: R9.1 R12.2 U.1 | length 238.4
  Top Layer w12: U.1 3315.43,1467.4 3420,1467.4 R12.2
NetR9_2: R9.2 R10.2 U.4 | length 338.9
  Top Layer w12: U.4 3241.97,1390 R9.2@3400,1390 ; R10.2 R9.2@3400,1390 ; R9.2 R9.2@3400,1390 ; R9.2@3420,1390 R9.2@3400,1390
NetR13_2: R13.2 U02.1 | length 114.9
  Top Layer w12: 1694.8,1435 1694.8,1334.57 U02.1
NetR15_1: R15.1 R16.2 | length 85.2
  Top Layer w12: R16.2 R15.1
NetR19_1: R19.1 U66.3 | length 102.5
  Top Layer w12: R19.1@2805,2740 U66.3@2897.6,2740 ; U66.3@2890,2740 2895,2745 2896.97,2745 U66.3
NetR19_2: R19.2 RE2.8 | length 452.9
  Top Layer w20: v2(2740,2820) 2774.8,2820 R19.2
  Bottom Layer w12: RE2.8 2360,2870 2410,2820 2420,2820 v2(2740,2820)
NetR20_1: R20.1 U17.7 U18.3 | length 288.1
  Top Layer w20: U17.7 3482.4,2740.74 U18.3@3612.6,2740.74
NetR20_2: R20.2 U17.5 | length 181.1
  Top Layer w20: U17.5 3452.4,2640.74 R20.2
NetR22_1: R22.1 R25.2 U18.1 | length 376.5
  Top Layer w10: U18.1 3687.4,2763.14
  Top Layer w12: R22.1@3655,2565.74 3655,2685 3687.4,2717.4 U18.1 ; R22.1 3812.6,2570 R25.2
NetR22_2: R22.2 R23.2 U18.4 | length 197.2
  Top Layer w12: R23.2@3572.6,2465.74 R22.2@3572.6,2565.74 ; R22.2@3572.6,2575.74 3572.6,2616.37 U18.4
NetR26_2: R26.2 U01.1 | length 112.6
  Top Layer w12: R26.2 1710,2724.8 U01.1
NetR29_1: R29.1 U13.12 | length 288.6
  Top Layer w12: U13.12 2310,2115 2405,2020 R29.1
NetR30_1: R30.1 U13.15 | length 251.3
  Top Layer w12: U13.15 2462.6,2265 R30.1
NetR31_1: R31.1 U13.14 | length 267.9
  Top Layer w12: U13.14 2385,2215 2425,2175 2462.6,2175 R31.1
NetR32_1: R32.1 U13.13 | length 276.2
  Top Layer w12: U13.13 2345,2165 2410,2100 R32.1
NetR33_1: R33.1 U1.6 U1.7 | length 265.2
  Top Layer w12: U1.6 U1.7 3250,2270 v2(3280,2240)
  Bottom Layer w12: v2(3280,2240) 3280,2182.6 R33.1
NetR33_2: R33.2 R34.1 U16.6 | length 444.6
  Top Layer w12: v2(3490,2090) U16.6 3727.6,2090 R34.1
  Bottom Layer w12: R33.2@3355,2175 3450,2175 3490,2135 v2(3490,2090)
NetR35_1: R35.1 U1.8 U1.9 | length 95.7
  Top Layer w12: R35.1@2930,2365 2931.65,2363.35 U1.8
NetR35_2: R35.2 R36.1 U16.2 | length 738.8
  Top Layer w12: R35.2 R36.1@3415,2380 ; U16.2 3435,2140 3475,2180 3475,2340 R36.1@3437.6,2377.4
NetR36_2: R36.2 U16.1 | length 112.6
  Top Layer w12: U16.1@3395,2190 R36.2@3395,2302.6
NetR38_1: R38.1 U188.47 | length 163.5
  Top Layer w12: R38.1 4920,2205 4971.42,2153.58 U188.47
NetR39_1: R39.1 U188.14 | length 125.4
  Top Layer w12: R39.1 4971.42,1659.02 U188.14
NetRE3_3: RE3.3 U188.11 | length 796.1
  Top Layer w12: v2(4760,1800) 4810,1800 4846.42,1836.42 U188.11
  Bottom Layer w12: RE3.3@4220,2045 RE3.3 4420,2045 4665,1800 v2(4760,1800)
NetU1_13: U1.13 U1.14
NetU2_3: U2.3 U6.1 U6.4 | length 625.1
  Top Layer w12: U6.4 2607.6,1772.6 2625,1790 2670,1790 2682.4,1802.4 U6.1 U6.1@2682.4,1812.4 ; 2655,1790 2655,1440 2695,1400 U2.3
NetU12_1: U12.1 U13.3 | length 157.8
  Top Layer w12: U12.1@1853.86,2215 U13.3
NetU13_9: U13.9 U14.2 | length 178.7
  Top Layer w12: U13.9 2240,1965 2245,1960 U14.2@2245,1810
NetU13_10: U13.10 U14.1 | length 266.6
  Top Layer w12: U13.10 2270,2015 2290,1995 U14.1@2290,1808.35
NetU13_11: U13.11 U14.15 | length 595.9
  Top Layer w12: U13.11 2290,2065 2335,2020 2335,1760 2245,1670 U14.15
NetU17_3: U17.3 U66.1 U66.4 | length 299.2
  Top Layer w12: U66.4 2911.37,2665.63 2972.4,2726.66 U66.1 ; U66.1@2972.4,2735 3000.74,2735 3045,2690.74 U17.3
NSTATUS: EP1.9 RP1.6 | length 1006.9
  Top Layer w12: RP1.6 6286,2904 6345,2845 v1(6345,2785) ; v1(6935,2560) 6957.48,2537.52 EP1.9
  Bottom Layer w12: v1(6345,2785) 6410,2720 6705,2720 6860,2565 6930,2565 v1(6935,2560)
RESET: C24.2 EP1.14 R1.1 S1.2 | length 1760.6
  Top Layer w10: 6560,3335 C24.2
  Top Layer w12: S1.2@6350,3310 6375,3335 6460,3335 ; 6495,3335 6460,3335 ; v1(6540,2930) 6540,2660 6760.91,2439.09 EP1.14 ; 6560,3335 6460,3335
  Bottom Layer w12: S1.2@6350,3330 6350,3120 v1(6540,2930)
"SPI 595MLE": U14.12
"SPI CLK": U12.5 U14.11 | length 817.1
  Top Layer w12: v2(1705,1935) 1705,1835 1865,1675 2035,1675 2045,1665 U14.11 ; v2(1820,2050) U12.5
  Bottom Layer w12: v2(1705,1935) v2(1820,2050)
"SPI DA LE": U12.6
"SPI DATA": U12.4 U14.14 | length 858.9
  Top Layer w12: U12.4 1755,2094.57 1755,1860 1905,1710 2135,1710 2195,1650 U14.14
TCK: EP1.16 JTAG1.1 RP2.4 | length 1879.4
  Top Layer w12: RP2.4 6280,2375 6275,2370 6250,2370 6905,2370 6934.72,2399.72 EP1.16
  Bottom Layer w12: JTAG1.1 5815,2875 5865,2825 5945,2825 5985,2785 5985,2420 6030,2375 v1(6245,2375) v1@6250,2370
TDI: EP1.15 JTAG1.9 RP2.1 | length 1585.9
  Top Layer w12: JTAG1.9 5810,2475 5860,2525 v1(6125,2525) ; RP2.1 6285,2620 v1(6285,2685) ; v1(6715,2420) 6715.59,2419.41 EP1.15
  Bottom Layer w12: v1(6125,2525) 6150,2550 6150,2620 6210,2680 6405,2680 6665,2420 v1(6715,2420)
TDO: EP1.20 JTAG1.3 | length 1617.6
  Top Layer w12: JTAG1.3 5805,2775 5855,2725 6405,2725 6475,2655 v1(6475,2505) ; v1(6810,2240) 6850,2240 6930,2320 EP1.20@7075,2320
  Bottom Layer w12: v1(6475,2505) 6740,2240 v1(6810,2240)
TMS: EP1.18 JTAG1.5 RP2.2 | length 1542
  Top Layer w12: JTAG1.5 5820,2675 5870,2625 6070,2625 6115,2580 6185,2580 RP2.2 ; v1@6770,2310 6885,2310 6935.35,2360.35 EP1.18
  Bottom Layer w12: v1(6200,2580) 6460,2580 6730,2310 v1(6780,2310)
VCC1.2: C13.2 C14.2 C15.2 C16.2 C17.2 C18.2 C32.1 C33.1 EP1.5 EP1.29 EP1.37 EP1.45 EP1.61 EP1.78 EP1.102 EP1.109 EP1.116 EP1.134 LM1117-1.2.2 LM1117-1.2.4 | length 5138.4
  Top Layer w12: EP1.5 7138.74,2616.26 v1@7155,2600 ; v1@7349.69,2670 EP1.134 ; EP1.116 7704.02,2715.98 7735,2685 v1(7735,2650) ; v1@7800,2104.45 EP1.78 ; v1(7806.89,2576.89) EP1.102 ; EP1.109 7893.98,2820 v1@7920,2820
  Top Layer w30: LM1117-1.2.2 6700,1364.45 6755,1419.45 v1(6755,1450) ; LM1117-1.2.4@6752.28,1364.45 LM1117-1.2.4@6755,1367.16
  Bottom Layer w30: 6905,1795 6755,1645 6755,1575 ; C32.1 6760,1455 v1(6755,1450) 6755,1575 ; C33.1 6755,1575
  Bottom Layer w31: 6905,1795 7075,1795 ; C13.2@6995,2145 7195,2145 7230,2110 ; v1@7155,2600 7045,2710 7045,2890 7330.2,2890 7340,2880.2 7700,2880.2 7840,2880.2 7869.8,2880.2 8050,2700 8050,1950 ; v1(7350,2670) 7350,2875 ; 7705,2880.2 7705,2715 7735,2685 v1(7735,2650) ; v1(7800,2105) 8050,2105 ; v1@7815,2575 8030.2,2575
  other v1: 7170,2145 7165,2590 7930,2820
VCC2.5: C22.2 C23.2 C34.1 C35.2 EP1.35 EP1.107 LM1117-2.5.2 LM1117-2.5.4 | length 1561.7
  Top Layer w12: EP1.107 7975.31,2675.32 8045,2745 v1(8045,2800)
  Top Layer w30: 6140,1704.45 LM1117-2.5.2 LM1117-2.5.4 v1(6544.45,1704.45) ; v1@6545.12,1705 C35.2@6644.88,1705 ; C34.1@6644.88,1630.12 C35.2@6644.88,1705 ; C35.2 C35.2@6644.88,1705 ; C35.2@6645,1705 C35.2@6644.88,1705
  Bottom Layer w12: v1(8045,2800) 8035,2800 8033.31,2801.69 8033.31,2806.72 8041.58,2815 C22.2@8045.2,2815
  Bottom Layer w30: v1(6544.45,1704.45) 6559.45,1704.45 6766.96,1911.96 ; 6763.93,1915 6766.96,1911.96 ; 7135,2020 6875,2020 6766.96,1911.96
VCC3.3: C1.2 C26.1 C27.1 C28.1 C29.1 C30.1 EP1.17 EP1.26 EP1.40 EP1.47 EP1.56 EP1.62 EP1.81 EP1.93 EP1.117 EP1.122 EP1.130 EP1.139 EPCS4.3 EPCS4.7 EPCS4.8 JTAG1.4 LM1117-1.2.3 LM1117-2.5.3 LM1117-3.3.2 LM1117-3.3.4 R1.2 R6.1 R7.1 RP1.1 RP1.2 RP1.3 RP2.7 RP2.8 Y1.4
VREF: C73.2 R27.1 R28.1 U2.2 U17.2 | length 260.2
  Top Layer w12: C73.2 1499.8,2130 ; R27.1 1499.8,2130 ; R28.1 1499.8,2130
pads on no net: EP1.23 EP1.25 EP1.88 EP1.89 EP1.90 EP1.91 J2.2 J2.3 J2.4 J2.5 J2.6 J2.7 J2.8 J2.10 J2.11 J2.12 J2.13 J2.14 J2.15 J2.16 JTAG1.6 JTAG1.7 JTAG1.8 R5.1 RE1.2 RE1.3 RE1.4 RE1.5 RE1.6 RE2.2 RE2.3 RE2.4 RE2.5 RE2.6 RE3.5 RE3.6 RE3.9 RP1.4 RP1.5 U13.1 U13.2 U13.4 U13.5 U14.9 U188.25 U188.26 U188.35 U188.36 Y1.1
copper on no net: | length 13894.8
  Top Layer w12: 5880,2775 5900,2775 5975,2775 6104,2904 6180,2904 6180,2905 ; 5910,2016 6579,2016 6580,2015 6770,2015 6936.5,2181.5 7016.5,2181.5 7037.87,2202.87 7080,2202.87 7217.87,2202.87 7270.2,2255.2 ; 6190,2905 6180,2905 ; 6360,2615 6360,2580 6405,2580 6425,2560 6425,2425 v1(6415,2415) ; 6433,2885 6433,2935 6470,2935 6520,2985 6653,2985 ; 6560,2985 6560,3160 ; 6560,3260 6560,3160 ; 6635,3035 v1(6735,3035) ; 7080,2380.04 7250.16,2380.04 7270.2,2360 ; 7251.26,2767.83 7251.26,2698.74 7294.84,2655.16 7294.84,2590.16 ; 7428.42,2767.83 7428.42,2706.58 v1@7522.5,2612.5 ; v1@7525,2605 7585.91,2665.91 7585.91,2767.83 ; 7566.22,2767.83 7566.22,2901.22 v1(7640,2975) ; 7585.91,2740.22 7585.91,2757.83 ; v1(7670,2630) 7670,2640 7684.33,2654.33 7684.33,2767.83 ; 7678.46,2478.46 7914.65,2478.46 7914.65,2458.78 7914.65,2450 ; 7737.2,2163.5 7914.65,2163.5 ; v1@7800,2399.72 7914.65,2399.72 8159.72,2399.72 8275,2515 8755,2515 ; 7913.74,2440 7914.65,2439.09 ; 7914.65,2419.41 7914.06,2420 7914.65,2420.59 7914.65,2439.09 ; 7914.65,2695 7990,2770.35 v1(7990,2855) ; v1(8150,2450) 7914.65,2450 ; 8745,2515 8895,2515 ; 8825,2145 8830.71,2150.71 8830.71,2165.71 v1@8860,2195 ; 6180,2905 6180,2940 6180,2975 6180,3045 6295,3160 6560,3160 ; 7914.65,2439.09 7914.65,2450
  Top Layer w31: v1(6065,2420) 6105,2380 v1(6105,2269.8)
  Top Layer w50: 6160,1613.9 6140,1613.9 5911.1,1613.9 5910,1615 ; 6220,2291.85 6131.85,2291.85 5910,2070 5910,2016 5910,1615 ; 6310,1405 5975,1405 5910,1470 5910,1615 ; 6312.28,1372.72 6312.28,1404.45 ; 6330,1400 6456.1,1273.9 6520,1273.9
  Bottom Layer w12: 2414.8,1435 2480,1435 ; v1(6735,3035) 6790,2975 7060,2975 ; v1(7990,2855) 8086.64,2951.64 8093.36,2951.64 ; 8150,2145 8810,2145 v1@8860,2195 ; v1(8850,2195) v1@8860,2195 ; 9160,2875 9160,2510 8860,2210 v1@8860,2195
  Bottom Layer w20: 2480,1435 2500,1455 2500,1460
  Bottom Layer w31: v1(6065,2420) v1@6065,2871.48 ; 6080,2015 6085,2020 6085,2115 6085,2195 6085,2249.8 v1(6105,2269.8) 6125.2,2290 6300,2290 v1@6420,2410 ; v1(7670,2630) 7670,2610 7685,2595 ; 7754.8,2400 v1(7799.72,2400)
  Bottom Layer w50: 7060,2975 7340,2975 v1(7640,2975) 8070,2975 8093.36,2951.64 8145.8,2899.2 8145.8,2575.86 v1(8150,2450) 8150,2165
  other v1: 7520,2610 6065,2875

## Polygon pours and split planes (outlines as drawn)
no net on Top Layer "TopLayer-GND 2" (hatched 90Degree grid 15 track 20, remove dead copper, pour order 1002): 5771,3969
no net on Bottom Layer "BottomLayer-GND 2" (hatched 90Degree grid 15 track 20, remove dead copper, pour order 1006): 5571,3764

## Keep-outs
Keep-Out Layer:
  circle w10: c9096,3764 r60
  circle w10: c7765,3935 r60
  lines w10: 7955,590 1155,590 1155,4018.79 1155,4080 9350,4080 ; 9345,590 9345,4018.79

## Silkscreen, mask and mechanical layers (free items; w line width, h text height)
Top Overlay:
  lines w9: 6910,3392 8210,3392 ; 7010,3242 7010,3542 ; 7110,3242 7110,3542 ; 7210,3242 7210,3542 ; 7310,3242 7310,3542 ; 7410,3242 7410,3542 ; 7510,3242 7510,3542 ; 7610,3242 7610,3542 ; 7710,3242 7710,3542 ; 7810,3242 7810,3542 ; 7910,3242 7910,3542 ; 8010,3242 8010,3542 ; 8110,3242 8110,3542 ; 8677,2928 8977,2928 ; 8677,3028 8977,3028 ; 8677,3128 8977,3128 ; 8677,3228 8977,3228 ; 8677,3328 8977,3328 ; 8677,3428 8977,3428 ; 8677,3528 8977,3528 ; 8817,2850 8817,3625
  text "115" at 8677,3553 h45
  text "114" at 8852,3553 h45
  text "113" at 8677,3453 h45
  text "112" at 8852,3453 h45
  text "7" at 7085,3417 h45 r90
  text "2" at 7185,3417 h45 r90
  text "144" at 7285,3417 h45 r90
  text "142" at 7385,3417 h45 r90
  text "138" at 7485,3417 h45 r90
  text "136" at 7585,3417 h45 r90
  text "133" at 7685,3417 h45 r90
  text "129" at 7785,3417 h45 r90
  text "127" at 7885,3417 h45 r90
  text "125" at 7985,3417 h45 r90
  text "121" at 8085,3417 h45 r90
  text "119" at 8185,3417 h45 r90
  text "+5V" at 6980,3407 h45 r90
  text "111" at 8677,3353 h45
  text "110" at 8852,3353 h45
  text "106" at 8677,3253 h45
  text "105" at 8852,3253 h45
  text "11" at 6985,3250 h45 r90
  text "1" at 7280,3250 h45 r90
  text "10" at 7085,3242 h45 r90
  text "3" at 7185,3242 h45 r90
  text "143" at 7385,3242 h45 r90
  text "141" at 7485,3242 h45 r90
  text "137" at 7585,3242 h45 r90
  text "135" at 7685,3242 h45 r90
  text "132" at 7785,3242 h45 r90
  text "128" at 7885,3242 h45 r90
  text "126" at 7985,3242 h45 r90
  text "124" at 8085,3242 h45 r90
  text "120" at 8185,3242 h45 r90
  text "104" at 8677,3153 h45
  text "103" at 8852,3153 h45
  text "101" at 8677,3053 h45
  text "100" at 8852,3053 h45
  text "99" at 8677,2953 h45
  text "98" at 8852,2953 h45
  text "87" at 8677,2853 h45
  text "GND" at 8852,2853 h45